# Altium PCB c3_hw_1.PcbDoc
Units mil, origin at the board's own origin, x right, y up, seen from the top; angles counter-clockwise.
Board outline 885 x 1040 mil, 2 copper layers (Top Layer, Bottom Layer); 2 components, 6 nets, 22 pads, 3 vias.
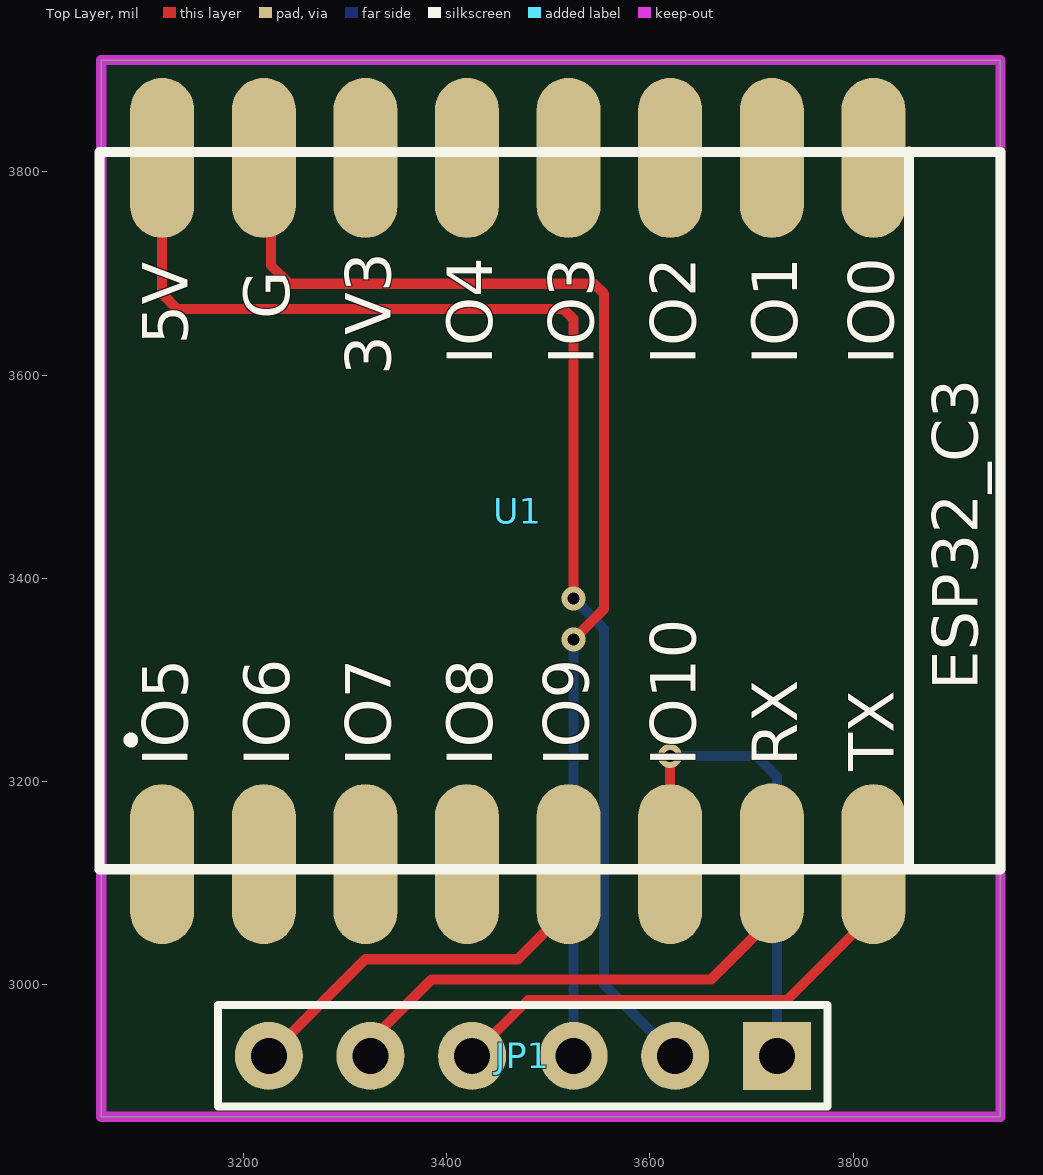
[diagram p0: Top Layer view]
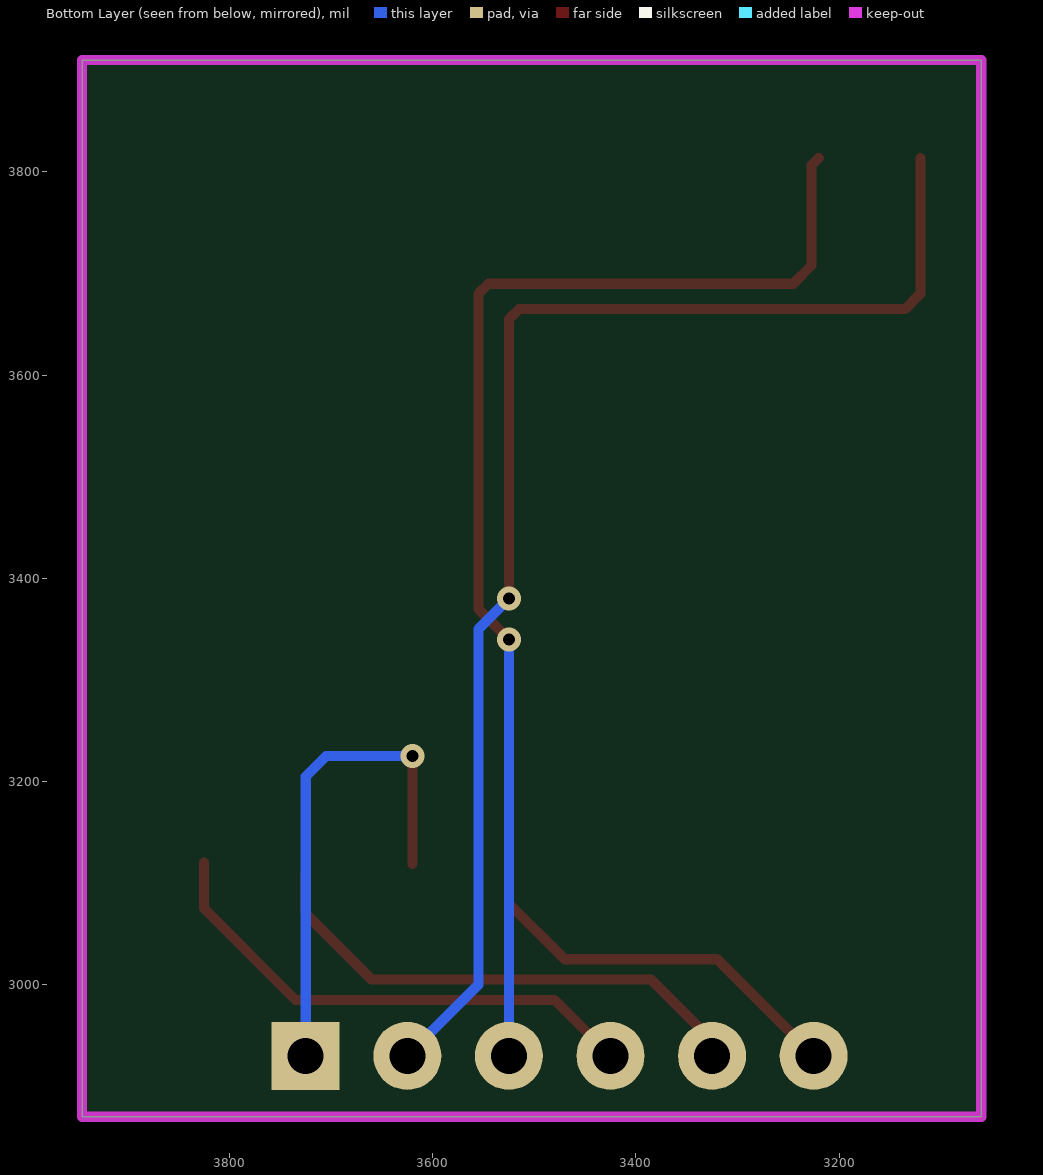
[diagram p1: Bottom Layer view, seen from below]

## Layer stack, top to bottom
Top Solder: solder mask 0.4, Solder Resist, Dk 3.5
Top Layer: signal copper 1.4
Dielectric 1: dielectric 12.6, FR-4, Dk 4.8
Bottom Layer: signal copper 1.4
Bottom Solder: solder mask 0.4, Solder Resist, Dk 3.5

## Board outline
3060,2870 3060,3910 3945,3910 3945,2870

## Design rules (kind name [scope] priority, off if disabled: settings)
Clearance [All] p1: gap=10 ignorepadtopadclearanceinfootprint=FALSE
PolygonConnect [All] p1: connectstyle=Relief reliefconductorwidth=10 reliefentries=4 polygonreliefangle="90 Angle" airgapwidth=10
RoutingVias [All] p1: holewidth=28 width=50 viastyle="Through Hole" minholewidth=28 minwidth=50 maxholewidth=28 maxwidth=50
SolderMaskExpansion [All] p1: expansion=4 istentingtop=FALSE
SupplyNets "Schematic Supply Nets_3" [InNet('GND')] p1: voltage=0.000
SupplyNets "Schematic Supply Nets_2" [InNet('+5')] p2: voltage=0.000
Width [All] p1: maxlimit=10 minlimit=10 preferedwidth=10
30 further rules are at their usual default settings.

## Classes and differential pairs
component class c3_hw_1: JP1

## Components (designator, comment, footprint, x,y, rotation, side; value= is the part's Value field where it differs from the comment)
JP1 "HDR-1X6" HDR2.54-LI-6P 3475,2930 r180 top
U1 "ESP32C3SUPERMINI" ESP32C3SUPERMINI 3475,3470 r90 top

## Footprints (in the part's own frame and the unit in brackets; to place one, negate y for a bottom-side part, rotate by r counter-clockwise, add the part's x,y. Pads: shape width x height; smd on the part's side, far side on the other; paste and mask are expansions set on the pad)
ESP32C3SUPERMINI [mm] "c3_hw_1"
  oval 4x1.6 smd paste+0 mask+0.051: 1(-8.922,9.017) 2(-8.922,6.477) 3(-8.922,3.937) 4(-8.922,1.397) 5(-8.922,-1.143) 6(-8.922,-3.683) 7(-8.902,-6.223) 8(-8.922,-8.763) 9(8.731,-8.763) 10(8.731,-6.223) 11(8.731,-3.683) 12(8.731,-1.143) 13(8.731,1.397) 14(8.731,3.937) 15(8.731,6.477) 16(8.731,9.017)
  silkscreen extent -9.05,-11.94 8.89,10.58, body extent -9.13,-11.9 8.87,10.63, height 0.25
HDR2.54-LI-6P [mm] "排针，6脚"
  rect 1.7x1.7 hole 0.9: 1(-6.35,0)
  round 1.7 hole 0.9: 2(-3.81,0) 3(-1.27,0) 4(1.27,0) 5(3.81,0) 6(6.35,0)
  silkscreen extent -7.62,-1.27 7.62,1.27, body extent -7.62,-1.27 7.62,1.27, height 8.5

## Part data
JP1: library part "Header 6", "6P接插件", BOM名称=6P接插件, 学习资源=www.ooocke.com, 版权归属=源创客

## Via types
v1: diameter 23.62, hole 11.81, Top Layer to Bottom Layer, 3 vias

## Nets (pads, with @x,y where several pads share a name; then routed paths per layer and width w, separated by ;. In a path a pad name is that pad's centre, name@x,y a point inside that pad or via, vN(x,y) a via of type N, cw(c..) or ccw(c..) an arc to the next point about the centre after c; other vN are vias at no path point)
+5: JP1.2 U1.16 | length 1315.5
  Top Layer w10: U1.16 3120,3680 3135,3665 3515,3665 3525,3655 v1(3525,3380)
  Bottom Layer w10: v1(3525,3380) 3555,3350 3555,3000 JP1.2
ESP32_IO9: JP1.6 U1.5 | length 390.9
  Top Layer w10: JP1.6 3320,3025 3470,3025 3525,3080 U1.5@3525,3108.74
ESP32_IO10: JP1.1 U1.6 | length 494.5
  Top Layer w10: U1.6 v1(3620,3225)
  Bottom Layer w10: v1(3620,3225) 3705,3225 3725,3205 JP1.1
ESP32_RX: JP1.5 U1.7 | length 506.3
  Top Layer w10: JP1.5 3325,2945 3385,3005 3660,3005 3725,3070 U1.7@3725,3109.54
ESP32_TX: JP1.4 U1.8 | length 505.1
  Top Layer w10: JP1.4 3480,2985 3735,2985 3825,3075 U1.8@3825,3120
GND: JP1.3 U1.15 | length 1210.7
  Top Layer w10: U1.15 3227.13,3806.61 3227.13,3707.87 3245,3690 3545,3690 3555,3680 3555,3370 v1(3525,3340)
  Bottom Layer w10: JP1.3 v1(3525,3340)
pads on no net: U1.1 U1.2 U1.3 U1.4 U1.9 U1.10 U1.11 U1.12 U1.13 U1.14

## Keep-outs
Keep-Out Layer:
  lines w10: 3060,2870 3945,2870 3945,3910 3060,3910 3060,3820 3060,2870

## Text inside footprints (layer, text, board x,y; h text height)
U1: Top Overlay "ESP32_C3" at 3922.5,3290 h45 r90; Top Overlay "5V" at 3145,3630 h45 r90; Top Overlay "G" at 3245,3655 h45 r90; Top Overlay "3V3" at 3345,3600 h45 r90; Top Overlay "IO4" at 3445,3610 h45 r90; Top Overlay "IO3" at 3545,3610 h45 r90; Top Overlay "IO2" at 3645,3610 h45 r90; Top Overlay "IO1" at 3745,3610 h45 r90; Top Overlay "IO0" at 3840,3610 h45 r90; Top Overlay "IO5" at 3145,3215 h45 r90; Top Overlay "IO6" at 3245,3215 h45 r90; Top Overlay "IO7" at 3345,3215 h45 r90; Top Overlay "IO8" at 3445,3215 h45 r90; Top Overlay "IO9" at 3540,3215 h45 r90; Top Overlay "IO10" at 3645,3215 h45 r90; Top Overlay "RX" at 3745,3215 h45 r90; Top Overlay "TX" at 3840,3210 h45 r90